# Altium PCB SCE5x5.PcbDoc
Units mm, origin at the board's own origin, x right, y up, seen from the top; angles counter-clockwise.
Board outline 152.4 x 101.6 mm, 2 copper layers (Top Layer, Bottom Layer); 14 components, 10 nets, 40 pads, 0 vias.
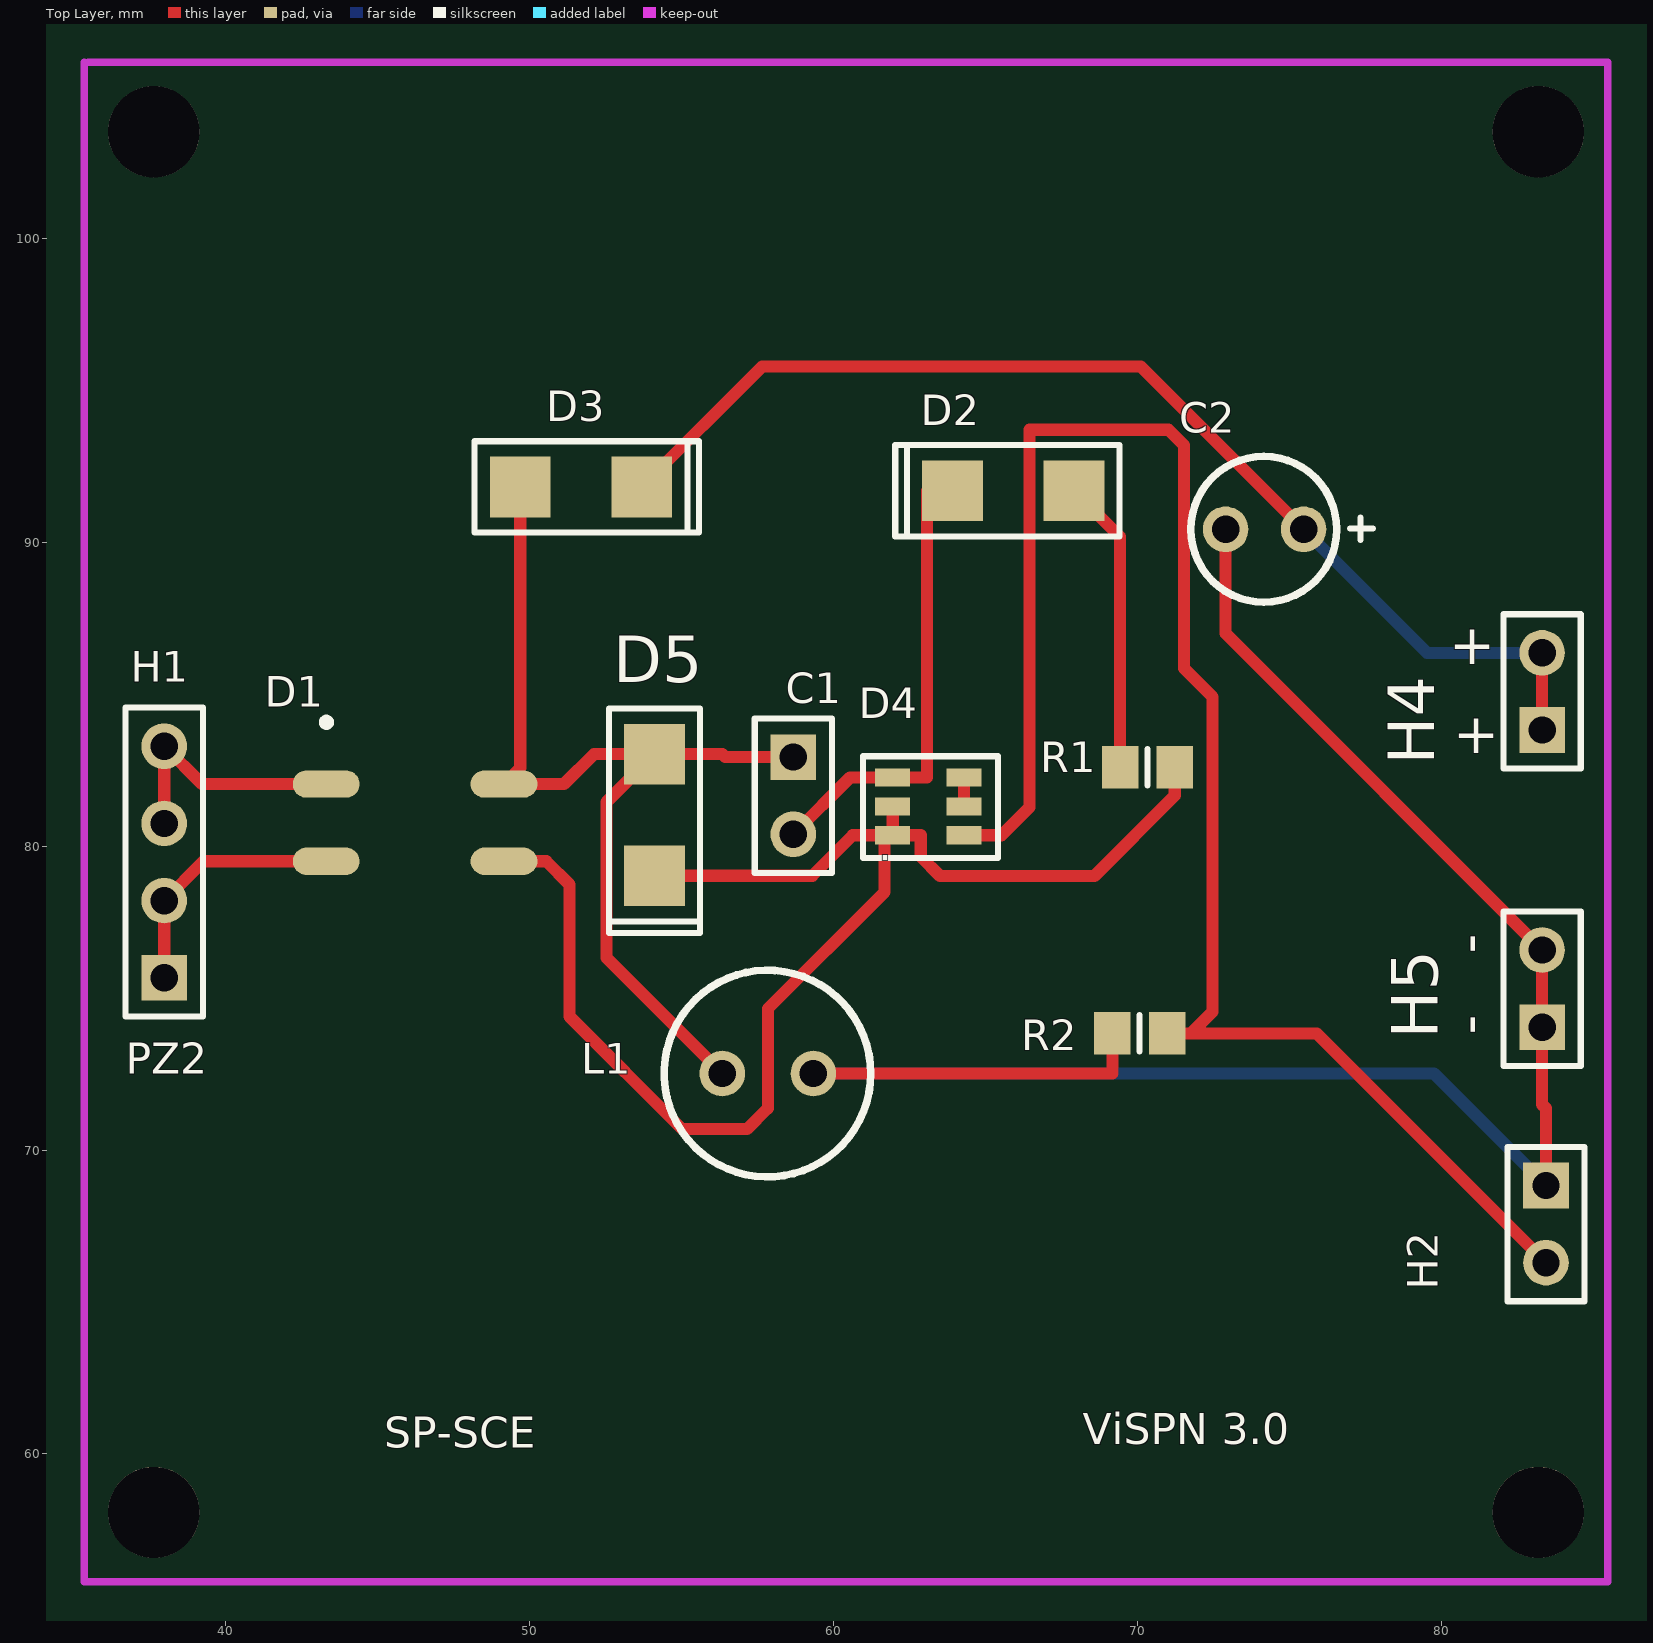
[diagram p0: Top Layer view]
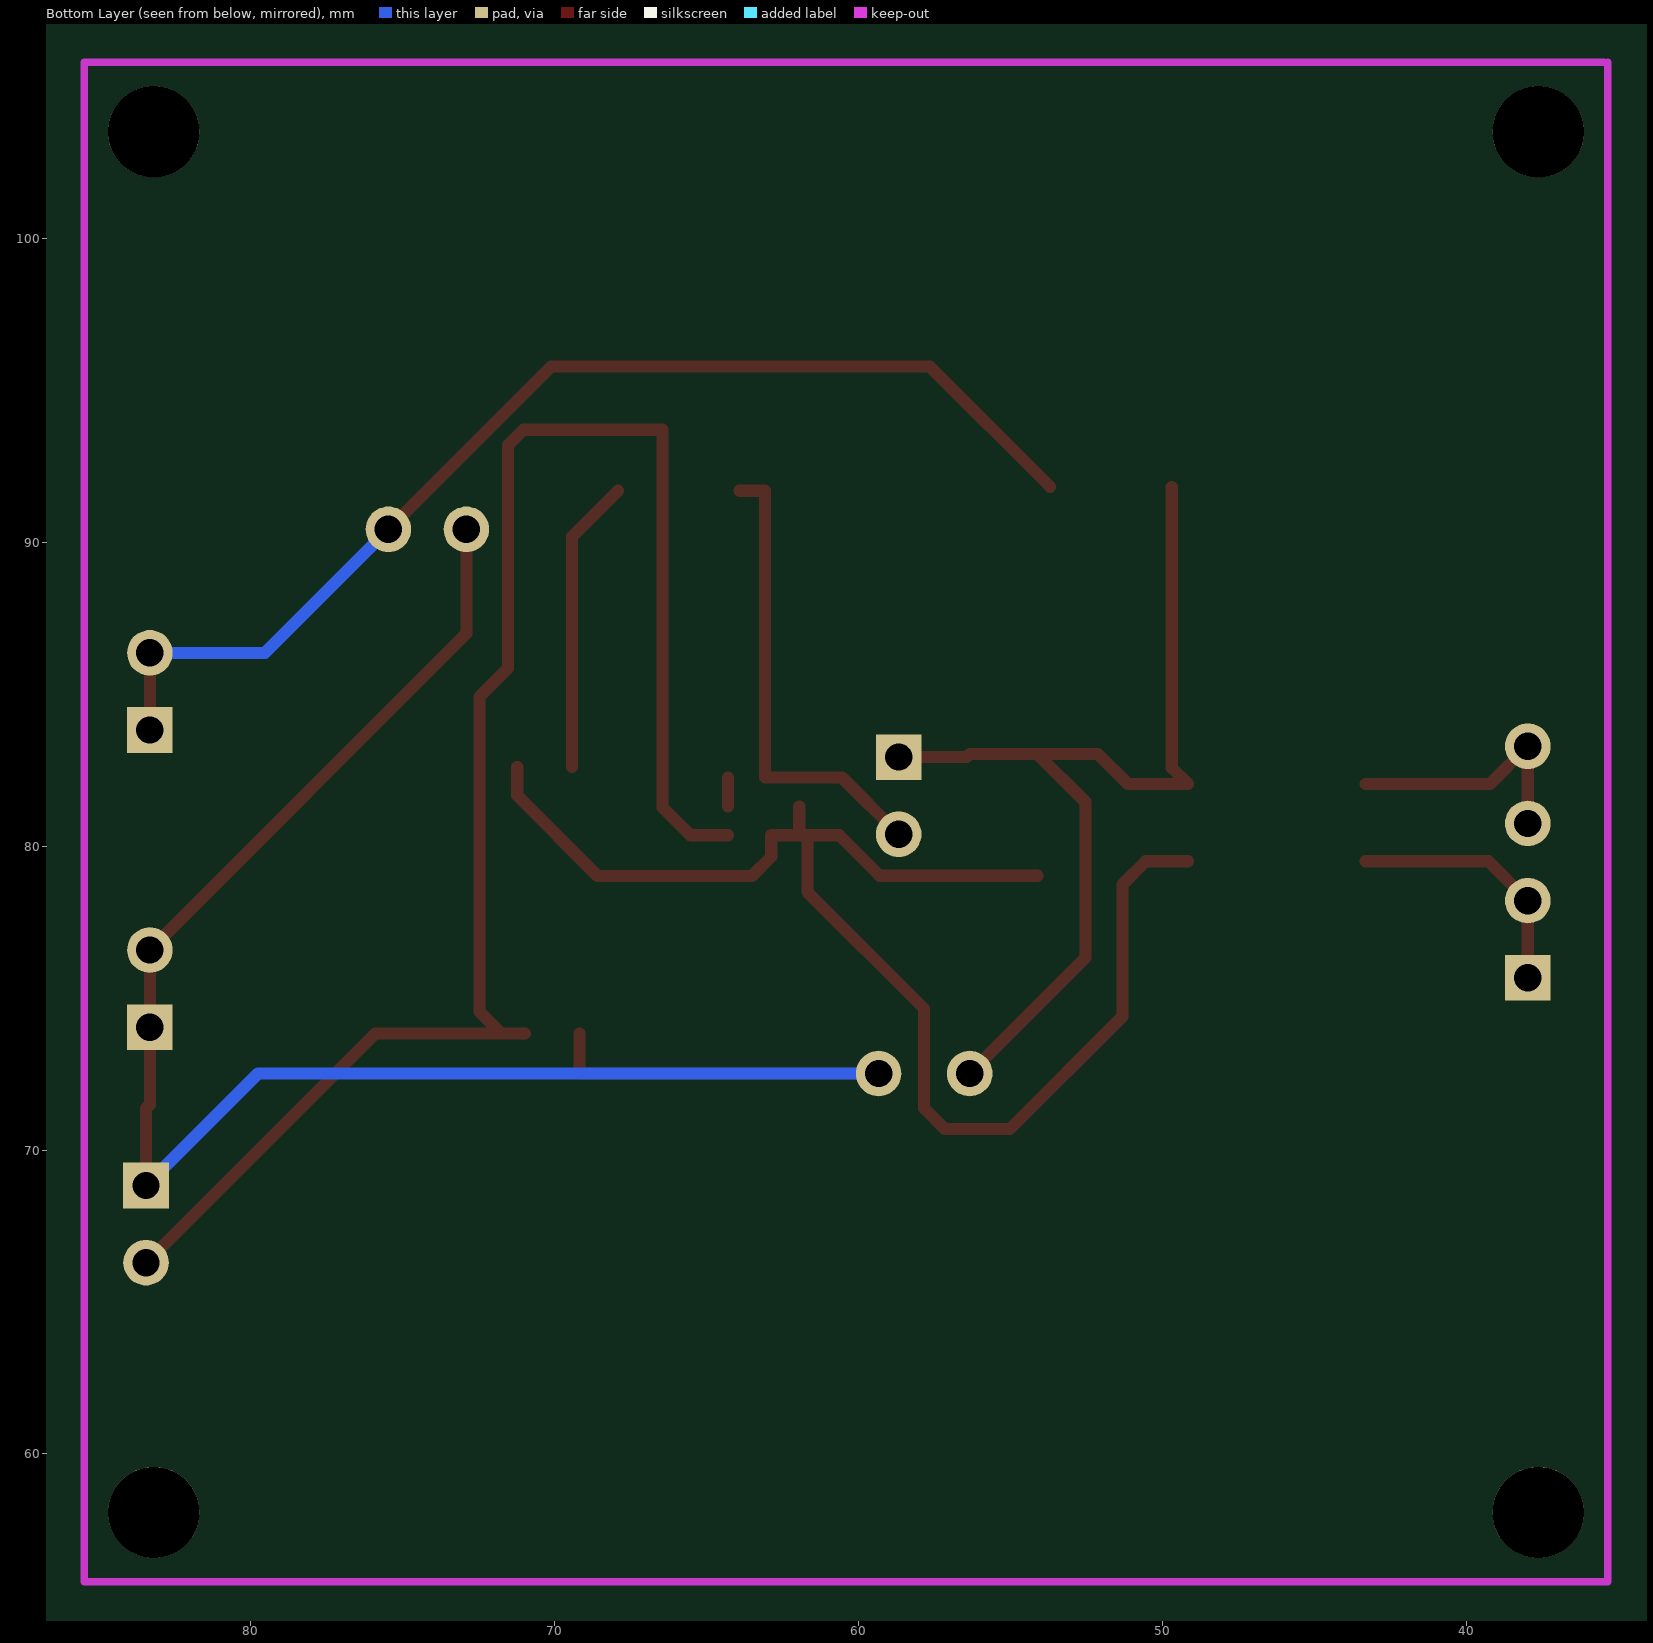
[diagram p1: Bottom Layer view, seen from below]

## Layer stack, top to bottom
Top Layer: signal copper 0.0356
Dielectric: dielectric 0.32, FR-4, Dk 4.8
Bottom Layer: signal copper 0.0356

## Board outline
25.4,25.4 177.8,25.4 177.8,127 25.4,127

## Design rules (kind name [scope] priority, off if disabled: settings)
Clearance [All] p1: gap=0.254
PolygonConnect [All] p1: connectstyle=Relief reliefconductorwidth=0.254 reliefentries=4 polygonreliefangle="90 Angle" airgapwidth=0.254
RoutingVias [All] p1: holewidth=0.711 width=1.27 viastyle="Through Hole" minholewidth=0.711 minwidth=1.27 maxholewidth=0.711 maxwidth=1.27
SilkToSilkClearance [All] p1: silktosilkclearance=0
SolderMaskExpansion [All] p1: expansion=0.102
Width [All] p1: maxlimit=0.4 minlimit=0.4 preferedwidth=0.4
27 further rules are at their usual default settings.

## Components (designator, comment, footprint, x,y, rotation, side; value= is the part's Value field where it differs from the comment)
C1 "Cap" RAD-0.1 58.674,82.931 r270 top
C2 "Cap" RB 74.168,90.424 r180 top
D1 "MB6S" MB6S 46.228,80.772 r0 top
D2 "SS16" SS16 65.913,91.694 r180 top
D3 "SS16" SS16 51.689,91.821 r0 top
D4 "NPN" xn4601 61.976,82.296 r0 top
D5 "SS16" SS16 54.102,81.026 r270 top
H1 "Header1*4" Header1*4 37.973,75.692 r90 top
H2 "Header1*2" Header1*2 83.439,68.834 r270 top
H4 "Header1*2" Header1*2 83.312,83.82 r90 top
H5 "Header1*2" Header1*2 83.312,74.041 r90 top
L1 "Inductor" Inductance 56.515,72.517 r0 top
R1 "Res1" res 71.12,82.55 r270 top
R2 "Res1" res 70.866,73.787 r270 top

## Footprints (in the part's own frame and the unit in brackets; to place one, negate y for a bottom-side part, rotate by r counter-clockwise, add the part's x,y. Pads: shape width x height; smd on the part's side, far side on the other; paste and mask are expansions set on the pad)
Header1*2 [mm]
  rect 1.5x1.5 hole 0.9: 1(0,0)
  round 1.5 hole 0.9: 2(2.54,0)
  silkscreen extent -1.27,-1.27 3.81,1.27
Header1*4 [mm]
  rect 1.5x1.5 hole 0.9: 1(-0.025,0)
  round 1.5 hole 0.9: 2(2.515,0) 3(5.055,0) 4(7.595,0)
  silkscreen extent -1.3,-1.27 8.86,1.27
Inductance [mm]
  round 1.5 hole 0.9: 1(-0.178,0) 2(2.819,0)
  silkscreen extent -2.09,-3.4 4.71,3.4
MB6S [mm] "SOP127P600-8N"
  oval 2.2x0.9 smd: 1(-2.925,1.27) 2(-2.925,-1.27) 3(2.925,-1.27) 4(2.925,1.27)
  silkscreen extent -3.04,3.18 -2.79,3.43, body extent -2.05,-2.47 2.05,2.47, height 2.9
RAD-0.1 [mm] "无极性电容"
  rect 1.5x1.5 hole 0.9: 1(0,0)
  round 1.5 hole 0.9: 2(2.54,0)
  silkscreen extent -1.27,-1.27 3.81,1.27
RB [mm] "极性电容"
  round 1.5 hole 0.9: 1(-1.295,0) 2(1.27,0)
  silkscreen extent -3.58,-2.4 2.41,2.4
res [mm]
  rect 1.4x1.2 smd: 1(-0.051,-1.695) 2(-0.051,0.105)
  silkscreen extent -0.65,-0.8 0.55,-0.8, body extent -0.75,-1.87 0.65,0.28, height 0.7
SS16 [mm]
  rect 2x2 smd: 1(-2,0) 2(2,0)
  silkscreen extent -3.5,-1.5 3.88,1.5
xn4601 [mm]
  rect 1.15x0.6 smd: 1(-0.032,-1.941) 2(-0.032,-0.991) 3(-0.032,-0.041) 4(2.318,-0.041) 5(2.318,-0.991) 6(2.318,-1.941)
  silkscreen extent -1.02,-2.69 3.43,0.66, body extent 0.27,-2.54 2.02,0.56, height 1.3

## Part data
C1 C2: "Capacitor"
D1: "Diode Bridge"
D2 D3 D5: "Schottky Diode"
D4: library part XN4601, "Composite Transistors"
R1 R2: "Resistor"

## Free pads (board coordinates)
  round 3 hole 3: 4(37.629,103.505) 5(83.185,103.505) 6(37.629,58.078) 7(83.184,58.078)

## Nets (pads, with @x,y where several pads share a name; then routed paths per layer and width w, separated by ;. In a path a pad name is that pad's centre, name@x,y a point inside that pad or via, vN(x,y) a via of type N, cw(c..) or ccw(c..) an arc to the next point about the centre after c; other vN are vias at no path point)
GND: C2.2 H2.1 H5.1 H5.2 L1.2 R2.1 | length 62.7
  Top Layer w0.4: L1.2 69.171,72.517 R2.1 ; C2.2 72.898,86.995 H5.2 H5.1 83.312,71.501 83.439,71.374 H2.1
  Bottom Layer w0.4: L1.2 79.756,72.517 H2.1
NetC1_2: C1.2 D2.2 D4.3 | length 15.4
  Top Layer w0.4: C1.2 60.538,82.255 D4.3 63.068,82.255 63.068,91.694 D2.2
NetD2_1: D2.1 R1.1 | length 9.7
  Top Layer w0.4: D2.1 69.425,90.182 R1.1
NetD4_4: D4.4 D4.5 | length 1
  Top Layer w0.4: D4.5 D4.4
P1: D1.1 H1.3 H1.4 | length 8.4
  Top Layer w0.4: H1.3 H1.4 39.218,82.042 D1.1
P2: D1.2 H1.1 H1.2 | length 8.4
  Top Layer w0.4: H1.1 H1.2 39.268,79.502 D1.2
V+: D1.3 D4.1 D4.2 D5.2 R1.2 | length 47.4
  Top Layer w0.4: D1.3 50.546,79.502 51.308,78.74 51.308,74.397 55.016,70.688 57.15,70.688 57.836,71.374 57.836,74.651 61.671,78.486 D4.1@61.671,80.355 ; D5.2 59.3,79.026 60.63,80.355 D4.1@61.671,80.355 ; D4.2 D4.1 ; R1.2 71.225,81.664 68.58,79.019 63.5,79.019 62.865,79.654 62.865,80.355 D4.1 ; D4.1@61.671,80.355 D4.1
V-: C1.1 D1.4 D3.1 D5.1 L1.1 | length 32.7
  Top Layer w0.4: D3.1 49.689,82.578 D1.4 51.13,82.042 52.114,83.026 D5.1 ; L1.1 52.527,76.327 52.527,81.451 D5.1 ; C1.1 56.432,82.931 56.337,83.026 D5.1
VR1: D4.6 H2.2 R2.2 | length 55.9
  Top Layer w0.4: D4.6 65.522,80.355 66.446,81.28 66.446,93.701 71.018,93.701 71.526,93.193 71.526,85.852 72.466,84.912 72.466,74.549 71.755,73.838 ; R2.2 71.755,73.838 ; H2.2 75.895,73.838 71.755,73.838
VSTO: C2.1 D3.2 H4.1 H4.2 | length 37.7
  Top Layer w0.4: D3.2 57.651,95.783 70.104,95.783 C2.1 ; H4.1 H4.2
  Bottom Layer w0.4: C2.1 79.527,86.36 H4.2

## Keep-outs
Keep-Out Layer:
  lines w0.254: 35.343,105.792 35.343,55.792 85.47,55.792 85.47,105.792 35.47,105.791

## Silkscreen, mask and mechanical layers (free items; w line width, h text height)
Top Overlay:
  text "+" at 80.264,85.979 h1.32
  text "+" at 80.391,83.058 h1.32
  text "-" at 81.534,76.454 h1.32 r90
  text "-" at 81.534,73.787 h1.32 r90
  text "PZ2" at 36.703,72.517 h1.02
  text "ViSPN 3.0" at 68.199,60.325 h1.02
  text "SP-SCE" at 45.212,60.198 h1.02